# Altium PCB EVB-A32QS1_RFRG_PCB.PcbDoc
Units mm, origin at the board's own origin, x right, y up, seen from the top; angles counter-clockwise.
Board outline 51 x 34 mm, 4 copper layers (L1 (Signal), L2 (GND), L3 (PWR), L4 (Signal)), stack 1.586 mm thick; 35 components, 27 nets, 143 pads, 70 vias.
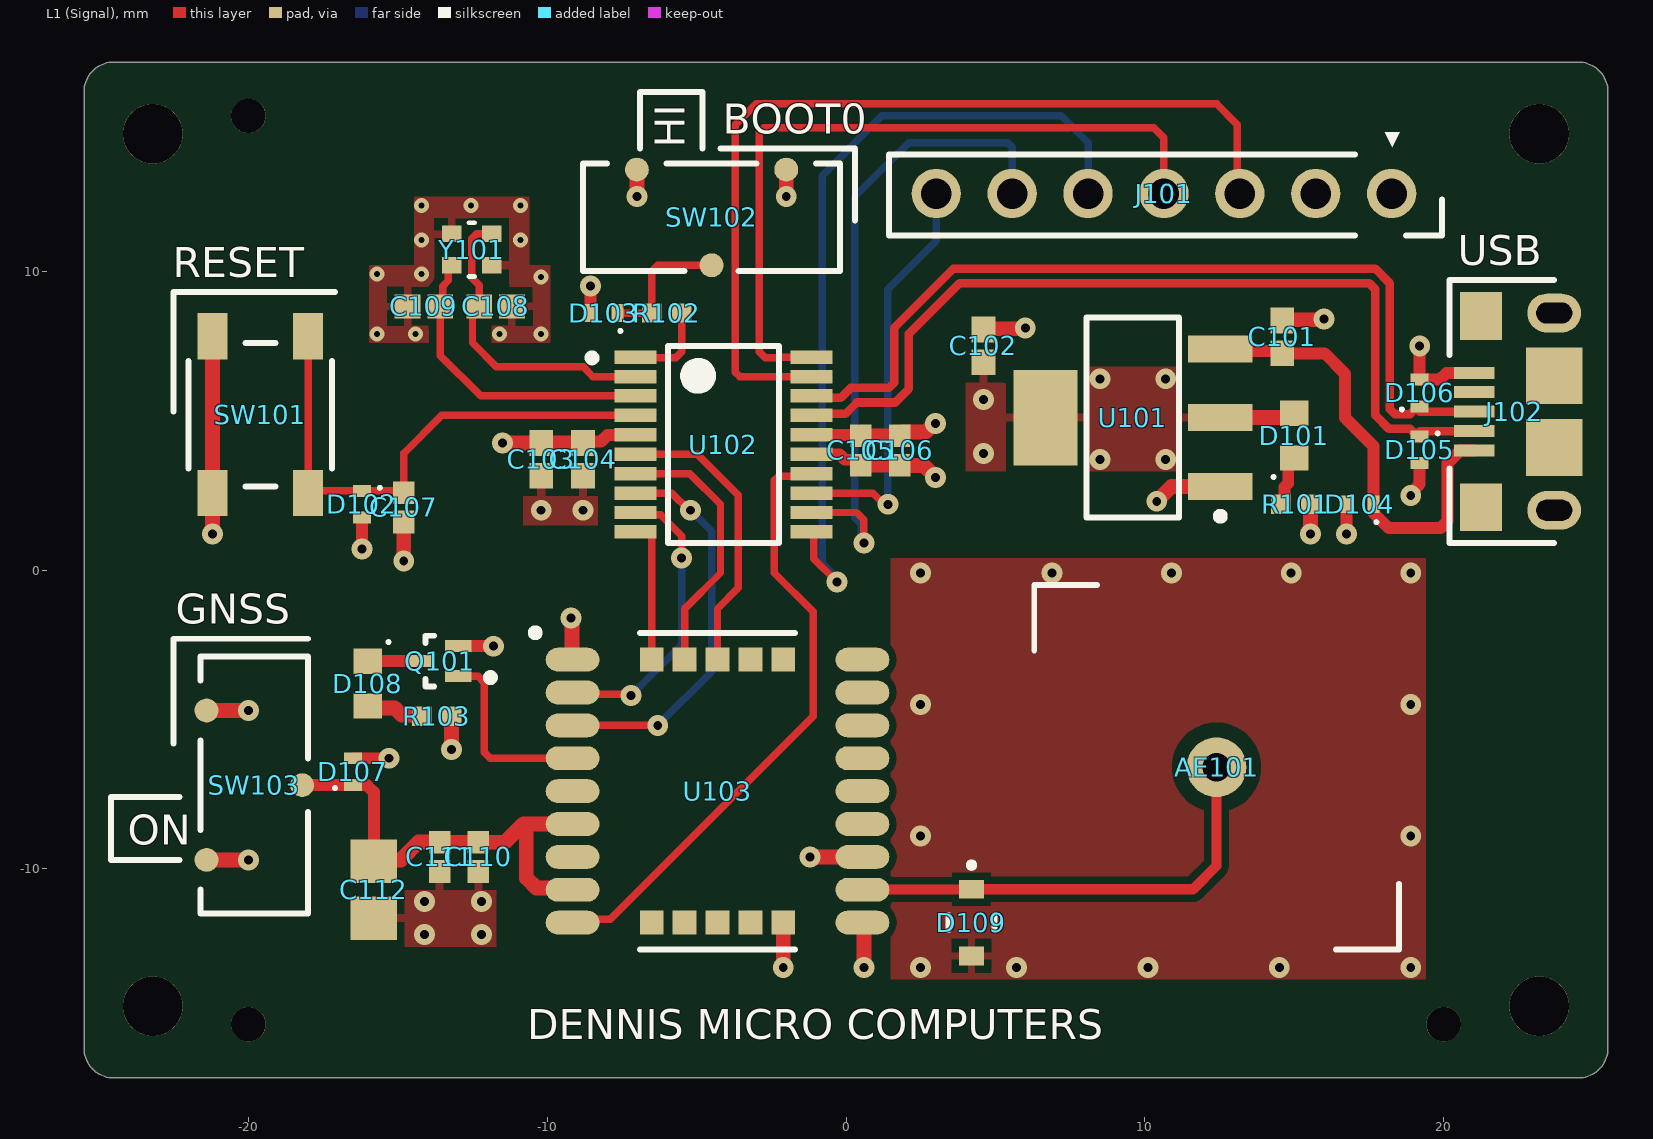
[diagram p0: L1 (Signal) view]
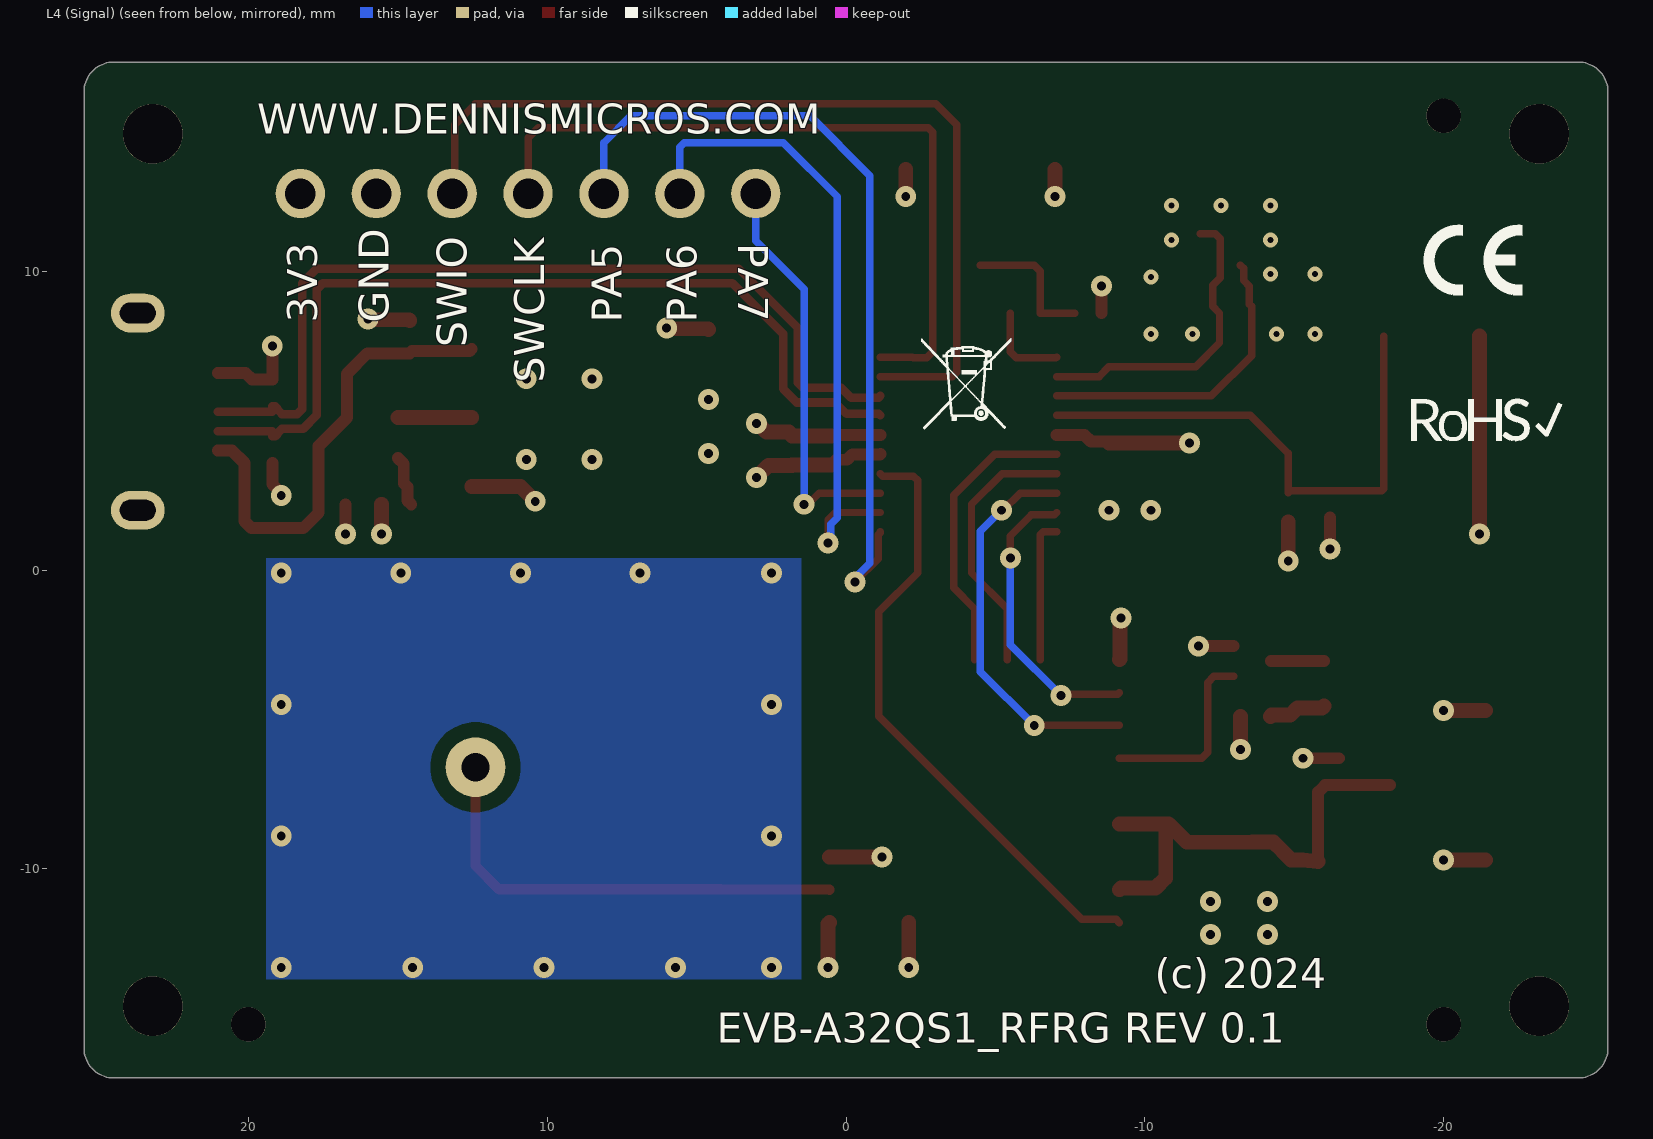
[diagram p1: L4 (Signal) view, seen from below]
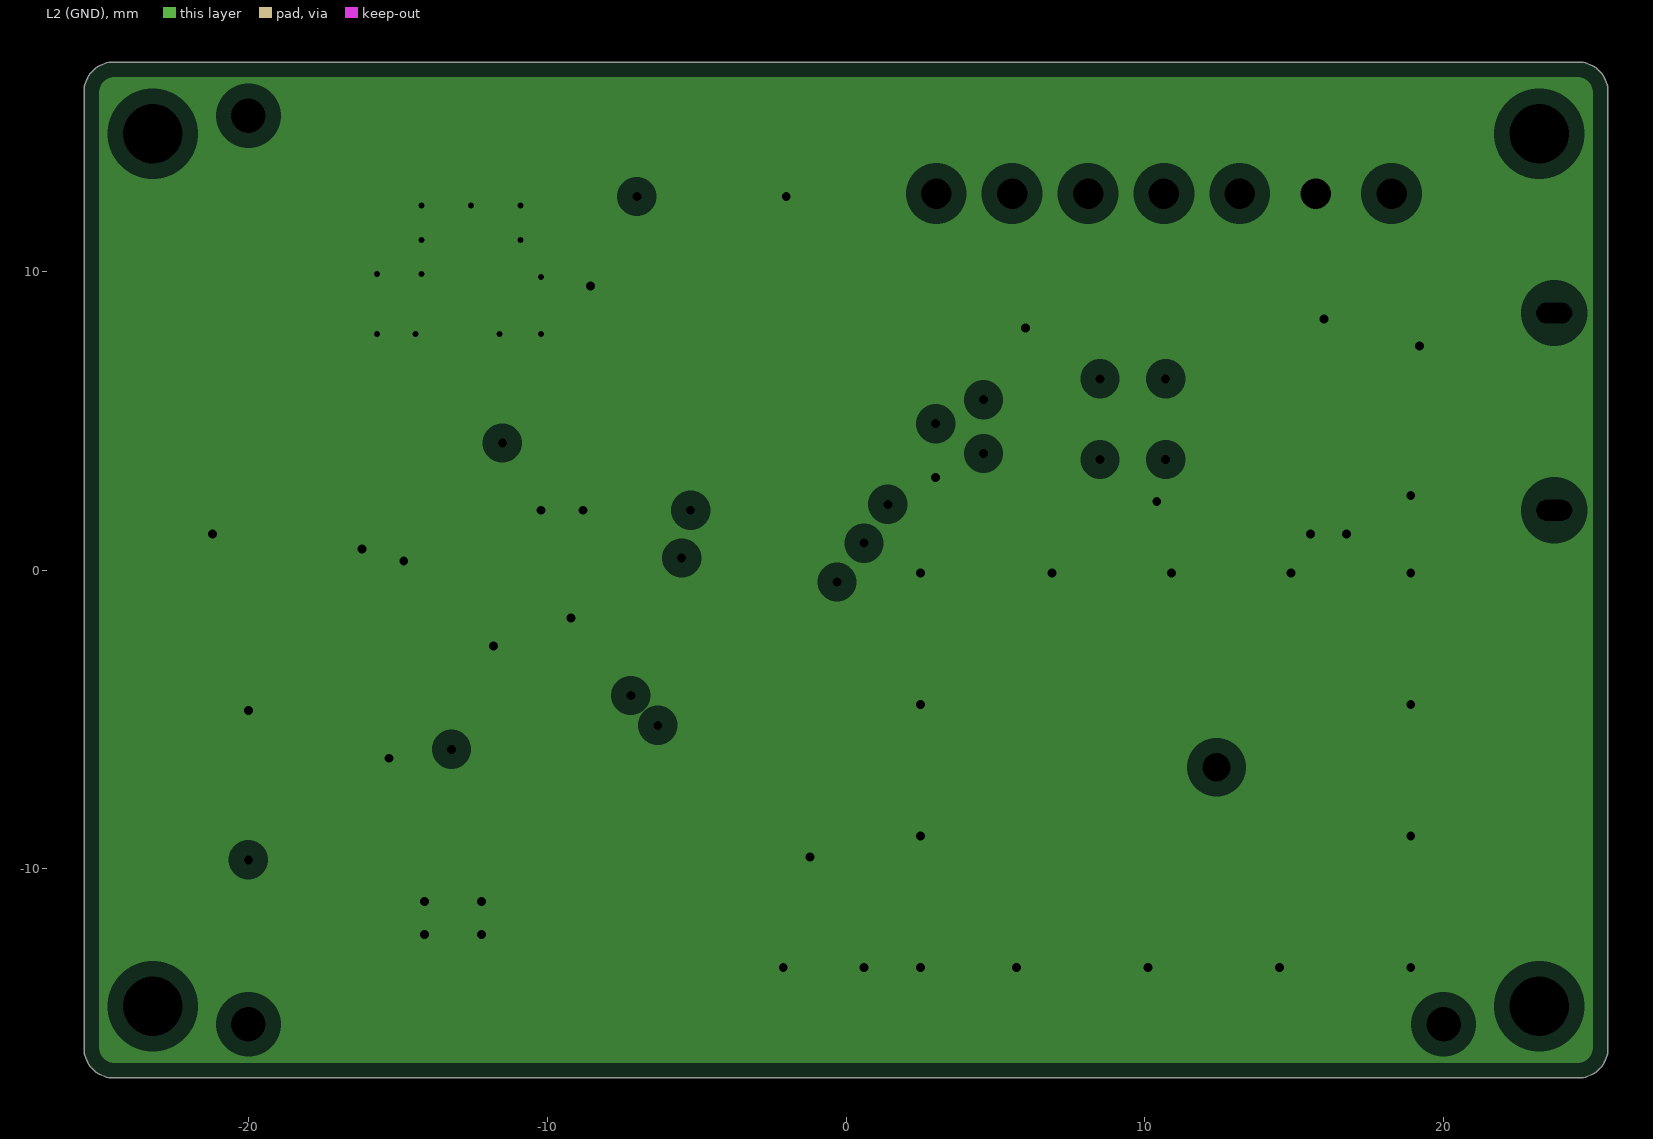
[diagram p2: L2 (GND), clearances drawn from the general rule]
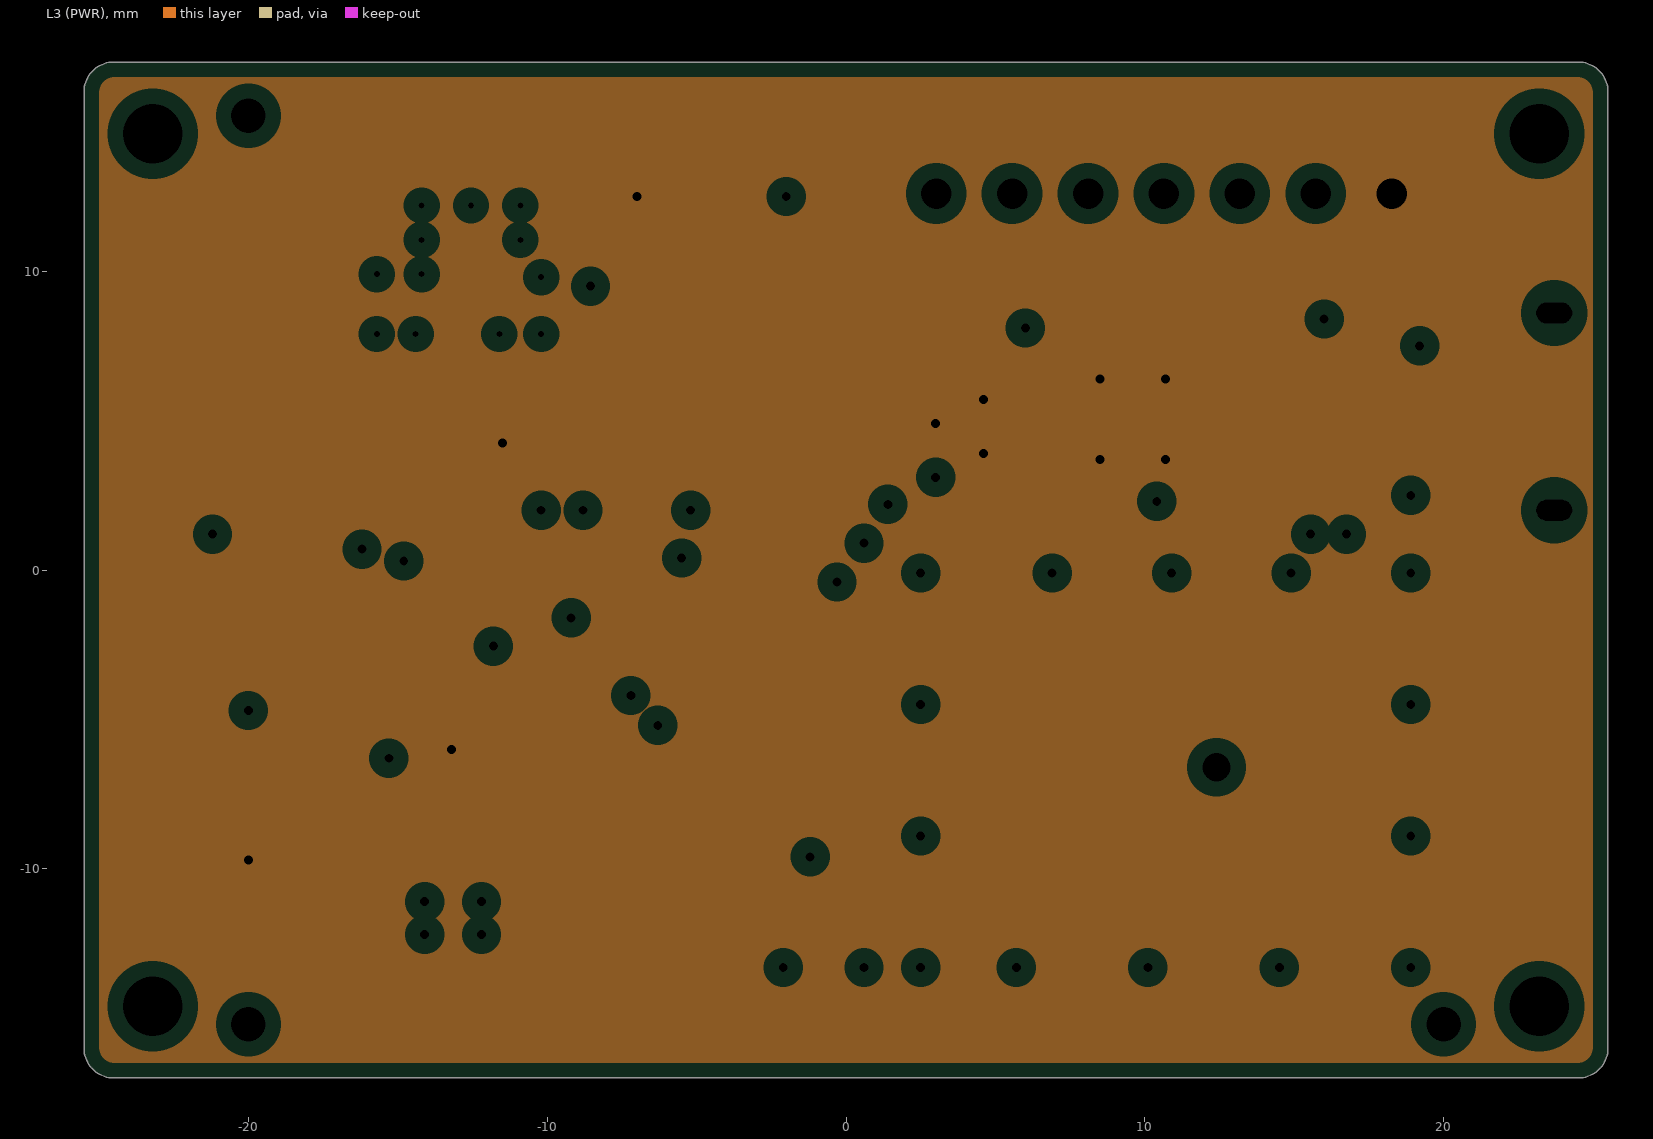
[diagram p3: L3 (PWR), clearances drawn from the general rule]
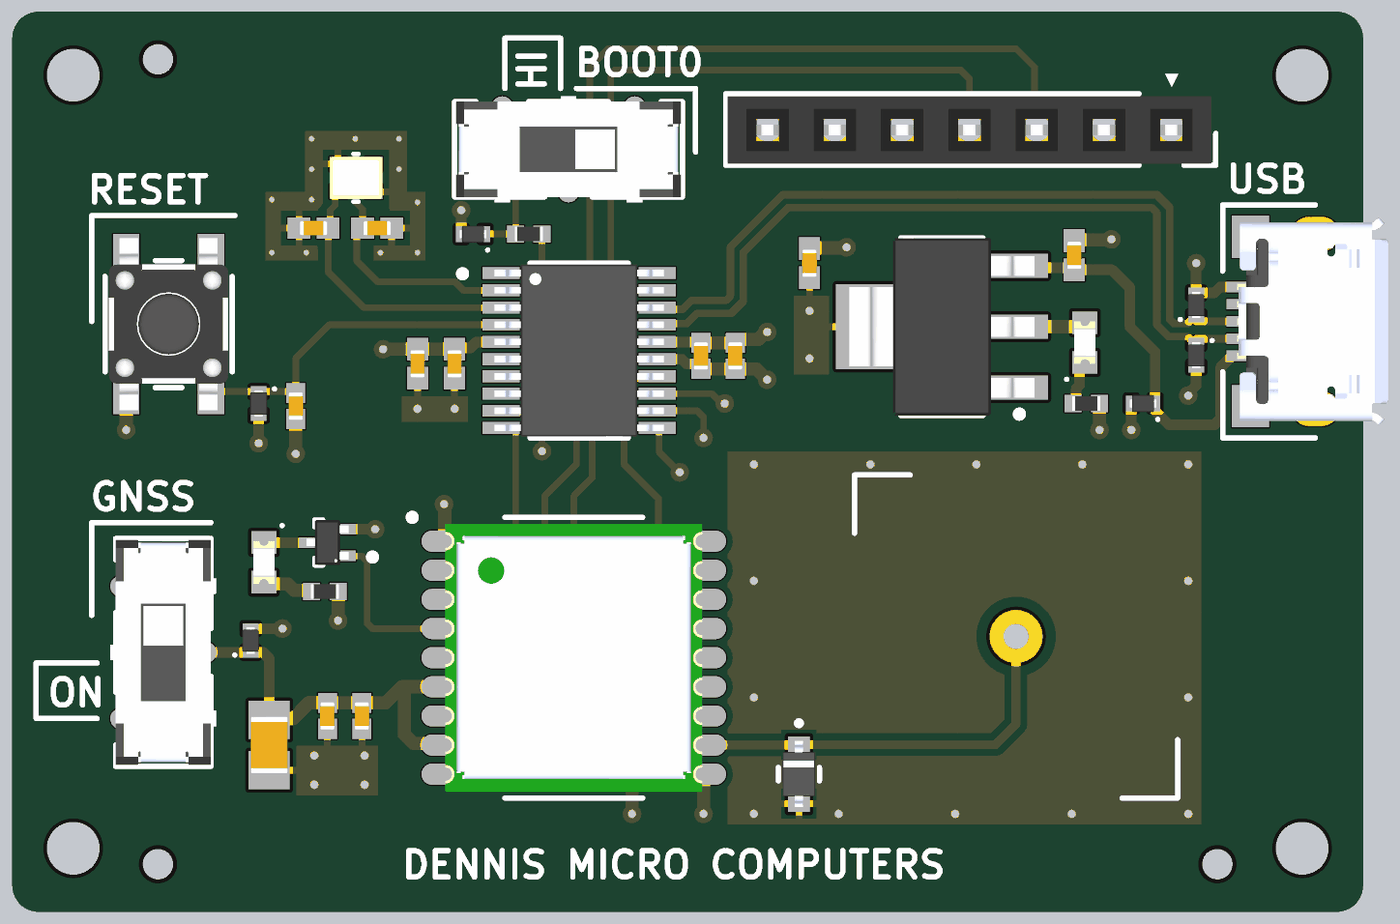
[diagram p4: 3D render of the assembled board from above, using the file's embedded part models]

## Layer stack, top to bottom
Top Solder: solder mask 0.0152, JLC-001, Dk 3.8
L1 (Signal): signal copper 0.035
PP1_7628: prepreg 0.2104, Nan Ya Plastics NP-155F 7628, Dk 4.4
L2 (GND): plane copper 0.0152, net GND
C_FR4: core 1.065, Nan Ya Plastics NP-155F FR4 / 1-7628, Dk 4.6
L3 (PWR): plane copper 0.0152, net +3V3
PP2_7628: prepreg 0.2104, Nan Ya Plastics NP-155F 7628, Dk 4.4
L4 (Signal): signal copper 0.035
Bottom Solder: solder mask 0.0152, JLC-001, Dk 3.8

## Board outline
-25.5,-16 -25.5,16 cw(c-24.5,16) -24.5,17 24.5,17 cw(c24.5,16) 25.5,16 25.5,-16 cw(c24.5,-16) 24.5,-17 -24.5,-17 cw(c-24.5,-16)

## Design rules (kind name [scope] priority, off if disabled: settings)
BoardOutlineClearance [IsText = 'True'] p1: gap=0.3 ignorepadtopadclearanceinfootprint=FALSE
Clearance [All] p1: gap=0.25 ignorepadtopadclearanceinfootprint=FALSE except(0.1: Arc-Arc Arc-Track Track-Track; 0.15: SMDPad-SMDPad; 0.22: Arc-SMDPad Track-SMDPad; 0.27: Arc-Via Arc-Hole Track-Via Track-Hole; 0.5: THPad-THPad)
DiffPairsRouting [InDifferentialPairClass('DIFF_USB')] p1: maxlimit=0.203 minlimit=0.203 mostfreqgap=0.203 toplayer_minwidth=0.286 toplayer_maxwidth=0.286 toplayer_prefwidth=0.286 bottomlayer_minwidth=0.286 bottomlayer_maxwidth=0.286 bottomlayer_prefwidth=0.286 impedanceprofiledriven=TRUE impedanceprofileid={1D80E4EB-765F-47FF-8A09-11E6335E2081} impedanceprofilevalue=90.000000 maxuncoupledlength=12.7
HoleSize NPTHSlotSize [HoleType = 'Slot' && PadIsPlated = 'False'] p1: absolutevalues=TRUE maxlimit=5.6 minlimit=1 maxpercent=80.000 minpercent=20.000
HoleSize PTHSlotSize [HoleType = 'Slot' && PadIsPlated = 'True'] p2: absolutevalues=TRUE maxlimit=5.6 minlimit=0.5 maxpercent=80.000 minpercent=20.000
HoleSize PTHSize [PadIsPlated = 'True'] p3: absolutevalues=TRUE maxlimit=6.35 minlimit=0.2 maxpercent=80.000 minpercent=20.000
HoleSize NPTHSize [PadIsPlated = 'False'] p4: absolutevalues=TRUE maxlimit=6.3 minlimit=0.2 maxpercent=80.000 minpercent=20.000
HoleToHoleClearance [All] p1: gap=0.5 allowstackedmicrovias=TRUE
MinimumAnnularRing ViaMinimumAnnularRing [IsVia] p1: minimumring=0.15
MinimumAnnularRing PTHMinimumAnnularRing [HoleType = 'Round' && IsVia = 'False' && PadIsPlated = 'True'] p2: minimumring=0.3
MinimumAnnularRing PTHSlotMinimumAnnularRing [HoleType = 'Slot' && PadIsPlated = 'True'] p3: minimumring=0.3
MinimumSolderMaskSliver [All] p1: minsoldermaskwidth=0.1
PlaneClearance [All] p1: clearance=0.508
PlaneConnect [All] p1: pad.planeconnectstyle=Relief pad.reliefexpansion=0.508 pad.reliefentries=4 pad.reliefconductorwidth=0.254 pad.reliefairgap=0.254 via.planeconnectstyle=Direct via.reliefexpansion=0.508 via.reliefentries=4 via.reliefconductorwidth=0.254 via.reliefairgap=0.254
PolygonConnect [All] p1: thpad.connectstyle=Relief thpad.reliefconductorwidth=0.254 thpad.reliefentries=4 thpad.polygonreliefangle="90 Angle" thpad.airgapwidth=0.254 smdpad.connectstyle=Relief smdpad.reliefconductorwidth=0.254 smdpad.reliefentries=4 smdpad.polygonreliefangle="90 Angle" smdpad.airgapwidth=0.254 via.connectstyle=Direct via.reliefconductorwidth=0.254 via.reliefentries=4 via.polygonreliefangle="90 Angle" via.airgapwidth=0.254
RoutingVias [All] p1: holewidth=0.3 width=0.7 viastyle="Through Hole" minholewidth=0.2 minwidth=0.5 maxholewidth=0.5 maxwidth=1
SilkToSilkClearance [All] p1: silktosilkclearance=0.3
SilkToSolderMaskClearance [IsPad] p1: minsilkscreentomaskgap=0.15 clearancetoexposedcopper=TRUE
SolderMaskExpansion [All] p1: expansion=0.127 istentingtop=FALSE
SupplyNets "Schematic Supply Nets_6" [InNet('+3V3_GNSS')] p1: voltage=0.000
SupplyNets "Schematic Supply Nets_5" [InNet('VBUS')] p2: voltage=0.000
SupplyNets "Schematic Supply Nets_4" [InNet('GND')] p3: voltage=0.000
SupplyNets "Schematic Supply Nets" [InNet('+3V3')] p4: voltage=0.000
UnRoutedNet [All] p1: checkbadconnections=TRUE
Width AE50 [InNetClass('AE50')] p1: maxlimit=0.342 minlimit=0.342 preferedwidth=0.342 impedanceprofiledriven=TRUE impedanceprofileid={35CBA2D1-E87A-4068-99C0-F5B5DE871103} impedanceprofilevalue=50.000000 minimp=50.000000 maximp=50.000000 favimp=50.000000
Width [All] p2: maxlimit=0.5 minlimit=0.1 preferedwidth=0.25
21 further rules are at their usual default settings.

## Classes and differential pairs
differential pair class DIFF_USB: USB_D
net class AE50: GNSS_RF_IN
differential pair USB_D: +USB_D_P -USB_D_N

## Components (designator, comment, footprint, x,y, rotation, side; value= is the part's Value field where it differs from the comment)
AE101 "YCGA002AA" AE_Quectel_YCGA002AA 12.4,-6.6 r0 top locked
C101 "CC0402MRX5R6BB105" C_Yageo_CC_0402_A 14.6,7.8 r270 top value=1uF
C102 "CC0402MRX5R6BB105" C_Yageo_CC_0402_A 4.6,7.5 r270 top value=1uF
C103 "CC0402MRX5R6BB105" C_Yageo_CC_0402_A -10.2,3.7 r90 top value=1uF
C104 "CC0402KRX7R7BB103" C_Yageo_CC_0402_A -8.8,3.7 r90 top value=10nF
C105 "CL05B104KP5NNNC" C_Samsung_CL_0402_A 0.5,4 r90 top value=100nF
C106 "CL05A475MP5NRNC" C_Samsung_CL_0402_A 1.8,4 r90 top value=4.7uF
C107 "CL05B104KP5NNNC" C_Samsung_CL_0402_A -14.8,2.1 r90 top value=100nF
C108 "CC0402JRNPO9BN150" C_Yageo_CC_0402_A -11.725,8.825 r180 top value=15pF
C109 "CC0402JRNPO9BN150" C_Yageo_CC_0402_A -14.125,8.825 r0 top value=15pF
C110 "CL05C330JB5NNNC" C_Samsung_CL_0402_A -12.3,-9.6 r90 top value=33pF
C111 "CL05B104KP5NNNC" C_Samsung_CL_0402_A -13.6,-9.6 r90 top value=100nF
C112 "CL21A106KOQNNNE" C_Samsung_CL_0805_A -15.8,-10.7 r90 top value=10uF
D101 "LTST-C190GKT" D_LED_Lite-On_Green_0603_A 15,4.5 r90 top
D102 "D5V0F1U2S9-7" D_TVS_Uni_Diodes_SOD-923_B -16.2,2.2 r270 top value=5E-13F
D103 "D5V0F1U2S9-7" D_TVS_Uni_Diodes_SOD-923_B -8.1,8.6 r180 top value=5E-13F
D104 "D5V0F1U2S9-7" D_TVS_Uni_Diodes_SOD-923_B 17.2,2.2 r180 top value=5E-13F
D105 "D5V0F1U2S9-7" D_TVS_Uni_Diodes_SOD-923_B 19.2,4.025 r270 top value=5E-13F
D106 "D5V0F1U2S9-7" D_TVS_Uni_Diodes_SOD-923_B 19.2,5.925 r90 top value=5E-13F
D107 "D5V0F1U2S9-7" D_TVS_Uni_Diodes_SOD-923_B -16.5,-6.75 r90 top value=5E-13F
D108 "LTST-C190GKT" D_LED_Lite-On_Green_0603_A -16,-3.8 r270 top
D109 "ESD7351HT1G" D_TVS_Uni_Onsemi_SOD-323 4.2,-11.8 r270 top
J101 "PPPC071LFBN-RC" J_Sullins_01x07_Socket_2.54mm 10.64,12.6 r180 top
J102 "10118193-0001LF" J_USB_Micro-B_Amphenol_10118193-0001LF 23.7,5.3 r90 top
Q101 "DTC043ZEBTL" Q_Rohm_SOT-416FL_B -13.6,-3.05 r180 top
R101 "RC0402FR-071KL" R_Yageo_RCL_0402_A 15.05,2.2 r180 top value=1kR
R102 "RC0402FR-0710KL" R_Yageo_RCL_0402_A -6,8.6 r0 top value=10kR
R103 "RC0402FR-071KL" R_Yageo_RCL_0402_A -13.7,-4.9 r0 top value=1kR
SW101 "PTS647SN50SMTR2LFS" SW_Tactitle_SPST_C&K_PTS647SN50SMTR2LFS -19.6,5.2 r270 top
SW102 "JS102011JCQN" SW_Slide_C&K_JS102011JCQN -4.5,11.8 r180 top
SW103 "JS102011JCQN" SW_Slide_C&K_JS102011JCQN -19.8,-7.2 r270 top
U101 "TLV1117LV33DCYR" U_TI_SOT-223_B 9.6,5.1 r180 top
U102 "STM32F070F6P6TR" U_ST_TSSOP20_B -4.1,4.2 r0 top
U103 "LC76GABMD" U_QUECTEL_LC76G -4.3,-7.4 r0 top
Y101 "ECS-240-12-37B-CKY-TR" Y_Crystal_GND24_ECS_240-12-37B-CKY-TR -12.525,10.725 r180 top

## Footprints (in the part's own frame and the unit in brackets; to place one, negate y for a bottom-side part, rotate by r counter-clockwise, add the part's x,y. Pads: shape width x height; smd on the part's side, far side on the other; paste and mask are expansions set on the pad)
AE_Quectel_YCGA002AA [mm]
  round 2 hole 0.95: 1(0,0)
  silkscreen extent -6.1,-6.1 6.1,6.1, body extent -6,-6 6,6, height 4
C_Samsung_CL_0402_A [mm] "Chip Capacitor, 2-Leads, Body 1.00x0.50mm, IPC Low Density"
  rect 0.76x0.72 smd mask+0.05: 1(-0.49,0) 2(0.49,0)
  body extent -0.53,-0.28 0.53,0.28, height 0.55
C_Samsung_CL_0805_A [mm] "Chip Capacitor, 2-Leads, Body 2.00x1.25mm, IPC Low Density"
  rect 1.45x1.55 smd: 1(-0.95,0) 2(0.95,0)
  body extent -1.07,-0.7 1.07,0.7, height 1.4
C_Yageo_CC_0402_A [mm] "Yageo series CC Chip Capacitor, 2-Leads, Body 1.00x0.50mm, IPC Low Density"
  rect 0.86x0.8 smd mask+0.05: 1(-0.55,0) 2(0.55,0)
  body extent -0.53,-0.28 0.53,0.28, height 0.7
D_LED_Lite-On_Green_0603_A [mm] "Chip Diode, 2-Leads, Body 1.60x0.70mm, IPC Low Density"
  rect 0.85x0.95 smd: 1(-0.75,0) 2(0.75,0)
  silkscreen extent -1.44,0.64 -1.34,0.74, body extent -0.8,-0.4 0.8,0.4, height 0.8
D_TVS_Uni_Diodes_SOD-923_B [mm] "SODFL, 2-Leads, Body 0.60x1.00mm, IPC Medium Density"
  rect 0.4x0.6 smd: 1(-0.45,0) 2(0.45,0)
  silkscreen extent -0.6,0.55 -0.5,0.65, body extent -0.5,-0.33 0.5,0.33, height 0.4
D_TVS_Uni_Onsemi_SOD-323 [mm]
  rect 0.63x0.83 smd: 1(-1.115,0) 2(1.115,0)
  silkscreen extent -2.02,-0.77 0.25,0.77, body extent -1.25,-0.62 1.25,0.62, height 1
J_Sullins_01x07_Socket_2.54mm [mm]
  round 1.65 hole 1.02 mask+0.05: 1(-7.62,0) 2(-5.08,0) 3(-2.54,0) 4(0,0) 5(2.54,0) 6(5.08,0) 7(7.62,0)
  silkscreen extent -9.3,-1.3 9.2,1.4, body extent -9.14,-1.2 9.14,1.34, height 8.5
J_USB_Micro-B_Amphenol_10118193-0001LF [mm] "USB - micro B USB 2.0 Receptacle Connector 5 Position Surface Mount, Right Angle; Through Hole"
  rect 0.4x1.35 smd mask+0.05: 1(-1.3,2.675) 2(-0.65,2.675) 3(0,2.675) 4(0.65,2.675) 5(1.3,2.675)
  rect 1.6x1.4 smd mask+0.05: 6(-3.2,2.45) 7(3.2,2.45)
  rect 1.9x1.9 smd mask+0.05: 8(1.2,0) 9(-1.2,0)
  oval 1.3x1.8 hole 0.7 slot 1.2 at 90 deg mask+0.05: 10(3.3,0) 11(-3.3,0)
  silkscreen extent -4.4,0 4.4,3.5, body extent -3.93,-2.76 3.93,2.95, height 2.81
Q_Rohm_SOT-416FL_B [mm] "SOTFL, 3-Leads, Body 1.60x1.60mm, Pitch 0.50mm, IPC Medium Density"
  rect 0.9x0.4 smd mask+0.05: 1(-0.625,0.5) 2(-0.625,-0.5) 3(0.625,0)
  silkscreen extent -1.83,-0.85 0.48,0.85, body extent -0.8,-0.85 0.8,0.85, height 0.85
R_Yageo_RCL_0402_A [mm] "Yageo series RC_L Chip Resistor, 2-Leads, Body 1.00x0.50mm, IPC Low Density"
  rect 0.65x0.65 smd mask+0.05: 1(-0.5,0) 2(0.5,0)
  body extent -0.53,-0.28 0.53,0.28, height 0.4
SW_Slide_C&K_JS102011JCQN [mm] "Slide Switch SPDT Surface Mount"
  round 0.8 smd mask+0.05: 1(-2.5,-1.6) 2(0,1.6) 3(2.5,-1.6)
  silkscreen extent -4.3,-1.8 4.3,1.8, body extent -4.25,-2 4.25,2, height 5.4
SW_Tactitle_SPST_C&K_PTS647SN50SMTR2LFS [mm] "Tactitle switch SPST-NO 4.5mm x 4.5mm"
  rect 1.55x1 smd mask+0.05: 1(-2.625,1.6) 2(2.625,1.6) 3(-2.625,-1.6) 4(2.625,-1.6)
  silkscreen extent -2.4,-2.4 2.4,2.4, body extent -3.25,-2.25 3.25,2.25, height 5
U_QUECTEL_LC76G [mm]
  oval 1.8x0.8 smd mask+0.05: 1(-4.85,4.4) 2(-4.85,3.3) 3(-4.85,2.2) 4(-4.85,1.1) 5(-4.85,0) 6(-4.85,-1.1) 7(-4.85,-2.2) 8(-4.85,-3.3) 9(-4.85,-4.4) 10(4.85,-4.4) 11(4.85,-3.3) 12(4.85,-2.2) 13(4.85,-1.1) 14(4.85,0) 15(4.85,1.1) 16(4.85,2.2) 17(4.85,3.3) 18(4.85,4.4)
  rect 0.8x0.8 smd mask+0.05: 19(2.2,4.4) 20(1.1,4.4) 21(0,4.4) 22(-1.1,4.4) 23(-2.2,4.4) 24(-2.2,-4.4) 25(-1.1,-4.4) 26(0,-4.4) 27(1.1,-4.4) 28(2.2,-4.4)
  silkscreen extent -6.22,-5.3 2.6,5.42, body extent -4.85,-5.05 4.85,5.05, height 2.66
U_ST_TSSOP20_B [mm] "TSOP, 20-Leads, Body 6.50x4.40mm, Pitch 0.65mm, IPC Medium Density"
  rect 1.4x0.45 smd mask+0.05: 1(-2.95,2.925) 2(-2.95,2.275) 3(-2.95,1.625) 4(-2.95,0.975) 5(-2.95,0.325) 6(-2.95,-0.325) 7(-2.95,-0.975) 8(-2.95,-1.625) 9(-2.95,-2.275) 10(-2.95,-2.925) 11(2.95,-2.925) 12(2.95,-2.275) 13(2.95,-1.625) 14(2.95,-0.975) 15(2.95,-0.325) 16(2.95,0.325) 17(2.95,0.975) 18(2.95,1.625) 19(2.95,2.275) 20(2.95,2.925)
  silkscreen extent -4.52,-3.3 1.85,3.3, body extent -3.2,-3.25 3.2,3.25, height 1.2
U_TI_SOT-223_B [mm] "SOT223, 4-Leads, Body 6.50x7.00mm (avg), Pitch 2.30mm, IPC Medium Density"
  rect 2.15x0.9 smd: 1(-2.925,2.3) 2(-2.925,0) 3(-2.925,-2.3)
  rect 2.15x3.2 smd: 4(2.925,0)
  silkscreen extent -3.05,-3.35 1.55,3.42, body extent -3.5,-3.35 3.5,3.35, height 1.8
Y_Crystal_GND24_ECS_240-12-37B-CKY-TR [mm]
  rect 0.65x0.55 smd mask+0.05: 1(-0.675,-0.525) 2(0.675,-0.525) 3(0.675,0.525) 4(-0.675,0.525)
  silkscreen extent -0.1,-0.9 0.1,0.9, body extent -1,-0.8 1,0.8, height 0.51

## Part data
AE101: library part CMP-00025-00001-2, "Antenna Module Linear 1602MHz", Frequency (Center/Band)=1.5825GHz, Frequency Group="UHF (1GHz ~ 2GHz)", Frequency Range="1.559GHz ~ 1.606GHz", Manufacturer=Quectel, Antenna Type="Ceramic Patch", Applications="GNSS, GPS", Mounting Type="Surface Mount", Number of Bands=1, RF Family/Standard=Navigation
C101 C102 C103: library part CMP-001-00016-11, "Multilayer Ceramic Capacitor, 1 uF, 50 V, ± 10%, X5R, 0402 [1005 Metric]", Case Code (Imperial)=0402, Case Code (Metric)=1005, Dielectric=X5R, LCSC Part Number=C113791, Max Operating Temperature=85°C, Min Operating Temperature=-55°C, Temperature Coefficient=30ppm/°C, Tolerance=20%, Voltage Rating=10V, Case/Package=0402, ComponentLink1Description=Datasheet, ComponentLink1URL=https://www.yageo.com/upload/media/product/app/datasheet/mlcc/upy-gphc_x5r_4v-to-50v.pdf, Dissipation Factor=10%, Halogen Free="Halogen Free", Height=0.5mm, Lead Free="Lead Free", Length=0.039inch, Material=Ceramic, Mounting Technology="Surface Mount", Packaging="Tape and Reel", Pins=2, RoHS Compliant=Yes, Series=CC, Termination=SMD/SMT, Thickness=0.022inch, Voltage Rating (DC)=10V, Width=0.02inch
C104: library part CMP-001-00029-1, "Multilayer Ceramic Capacitor, 0.01 uF, 16 V, ± 10%, X7R, 0402 [1005 Metric]", Case Code (Imperial)=0402, Case Code (Metric)=1005, Dielectric=X7R, Insulation Resistance=10GR, Max Operating Temperature=125°C, Min Operating Temperature=-55°C, Package Quantity=1, Temperature Coefficient=30ppm/°C, Tolerance=10%, Voltage Rating=16V, Case/Package=0402, ComponentLink1Description=Datasheet, ComponentLink1URL=https://www.yageo.com/upload/media/product/productsearch/datasheet/mlcc/UPY-GPHC_X7R_6.3V-to-250V_24.pdf, Depth=0.5mm, Dissipation Factor=3.5%, Halogen Free="Halogen Free", Height=0.5mm, Lead Free="Lead Free", Length=1mm, Material=Ceramic, Mounting Technology="Surface Mount", Packaging="Tape and Reel", Pins=2, Radiation Hardening=No, Reach SVHC Compliant=No, RoHS Compliant=Yes, Series=CC, Termination=SMD/SMT, Thickness=0.022inch, Voltage Rating (AC)=16V, Voltage Rating (DC)=16V, Width=0.02inch
C105 C107 C111: library part CMP-001-00023-3, "Multilayer Ceramic Capacitor, 0.1 uF, 10 V, ± 10%, X7R, 0402 [1005 Metric]", Case Code (Imperial)=0402, Case Code (Metric)=1005, Dielectric=X7R, Max Operating Temperature=125°C, Min Operating Temperature=-55°C, Package Quantity=1, Tolerance=10%, Voltage Rating=10V, Case/Package=0402, Construction=Flat, Depth=0.5mm, Height=0.5mm, Length=1mm, Material=Ceramic, Mounting Technology="Surface Mount", Packaging="Tape and Reel", Radiation Hardening=No, RoHS Compliant=Yes, Series=CL, Thickness=0.022inch, Voltage Rating (DC)=10V, Width=0.02inch
C106: library part CMP-001-00024-3, "Multilayer Ceramic Capacitor, 4.7 uF, 10 V, ± 20%, X5R, 0402 [1005 Metric]", Case Code (Imperial)=0402, Case Code (Metric)=1005, Dielectric=X5R, Max Operating Temperature=85°C, Min Operating Temperature=-55°C, Tolerance=20%, Voltage Rating=10V, Case/Package=0402, ComponentLink1Description=Datasheet, ComponentLink1URL=https://mm.digikey.com/Volume0/opasdata/d220001/medias/docus/863/CL05A475MP5NRNC_Spec.pdf, Height=550um, Lead Free="Lead Free", Material=Ceramic, Mounting Technology="Surface Mount", Packaging="Cut Tape", RoHS Compliant=Yes, Series=CL
C108 C109: library part CMP-001-00017-14, "Multilayer Ceramic Capacitor, 15 pF, 10 V, ± 5%, X7R, 0402 [1005 Metric]", Case Code (Imperial)=0402, Case Code (Metric)=1005, Dielectric=C0G, Dielectric Material=Ceramic, Insulation Resistance=100GR, Max Operating Temperature=125°C, Min Operating Temperature=-55°C, Package Quantity=1, Temperature Coefficient=30ppm/°C, Tolerance=5%, Voltage=50V, Case/Package=0402, ComponentLink1Description=Datasheet, ComponentLink1URL=https://www.yageo.com/upload/media/product/productsearch/datasheet/mlcc/UPY-GP_NP0_16V-to-50V_18.pdf, Depth=0.5mm, Halogen Free="Halogen Free", Height=0.5mm, Lead Free="Lead Free", Length=1mm, Material=Ceramic, Mounting Technology="Surface Mount", Packaging="Tape and Reel", Pins=2, Radiation Hardening=No, Reach SVHC Compliant=No, RoHS Compliant=Yes, Series=CC, Termination=SMD/SMT, Thickness=0.022inch, Voltage Rating=50V, Voltage Rating (AC)=50V, Voltage Rating (DC)=50V, Width=0.02inch
C110: library part CMP-001-00030-2, "Multilayer Ceramic Capacitor, 33 pF, 50 V, ± 5%, C0G (NP0), 0402 [1005 Metric]", Case Code (Imperial)=0402, Case Code (Metric)=1005, Dielectric=C0G, Max Operating Temperature=125°C, Min Operating Temperature=-55°C, Package Quantity=1, Temperature Coefficient=300ppm/°C, Tolerance=5%, Voltage=50V, Case/Package=0402, ComponentLink1Description=Datasheet, ComponentLink1URL=https://mm.digikey.com/Volume0/opasdata/d220001/medias/docus/2969/CL05C330JB5NNNC_Spec.pdf, Construction=Flat, Depth=0.5mm, Height=0.5mm, Lead Free="Lead Free", Length=1mm, Material=Ceramic, Mounting Technology="Surface Mount", Packaging="Tape and Reel", Radiation Hardening=No, RoHS Compliant=Yes, Series=CL, Thickness=0.022inch, Voltage Rating=50V, Voltage Rating (DC)=50V, Width=0.02inch
C112: library part CMP-001-00022-4, "Multilayer Ceramic Capacitor, 10 uF, 16 V, ± 10%, X5R, 0805 [2012 Metric]", Case Code (Imperial)=0805, Case Code (Metric)=2012, Dielectric=X7R, Max Operating Temperature=85°C, Min Operating Temperature=-55°C, Package Quantity=1, Tolerance=10%, Voltage=16V, Case/Package=0805, ComponentLink1Description=Datasheet, ComponentLink1URL=https://mm.digikey.com/Volume0/opasdata/d220001/medias/docus/609/CL21A106KOQNNNE_Spec.pdf, Construction=Flat, Depth=1.25mm, Height=1.25mm, Lead Free="Lead Free", Length=2mm, Material=Ceramic, Mounting Technology="Surface Mount", Packaging="Tape and Reel", Radiation Hardening=No, RoHS Compliant=Yes, Series=CL, Thickness=0.055inch, Voltage Rating=16V, Voltage Rating (DC)=16V, Width=0.049inch
D101 D108: library part CMP-007-00001-3, "LED Uni-Color Green 565nm 2-Pin Chip LED T/R", Case Code (Imperial)=0603, Case Code (Metric)=1608, Color=Green, Forward Current=30mA, Forward Voltage=2.1V, Lens Color=Colorless, Max Operating Temperature=85°C, Min Operating Temperature=-55°C, Package Quantity=1, Power Dissipation=100mW, Reverse Voltage=5V, Test Current=10mA, Voltage=2V, Case/Package=0603, ComponentLink1Description=Datasheet, ComponentLink1URL=https://mm.digikey.com/Volume0/opasdata/d220001/medias/docus/858/LTST-C190GKT.pdf, Depth=0.8mm, Dominant Wavelength=569nm, Height=0.9mm, Illumination Color=Green, Lead Free="Lead Free", Length=1.6mm, Lens Size=0.8mm, Lens Style=Flat,Diffused,Colorless,Rectangular,Clear, Lens Transparency=Clear, Luminous Intensity=6mcd, Mounting Technology="Surface Mount", Number of Elements=1, Number of LEDs=1, Packaging="Tape and Reel", Pins=2, Power Rating=100mW, Radiation Hardening=No, RoHS Compliant=Yes, Series=-, Viewing Angle=130°, Wavelength=565nm, Width=0.8mm
D102 D103 D104 D105 D106 D107: library part CMP-004-00007-2, "Diode TVS Dual Uni-Dir 5.5V 250000W 2-Pin SOD-923 T/R", Breakdown Voltage=6V, Case/Package=SOD-923-2, Clamping Voltage=10V, Max Operating Temperature=150°C, Max Power Dissipation=250mW, Max Reverse Leakage Current=100nA, Max Surge Current=1.5A, Min Operating Temperature=-65°C, Package Quantity=10000, Peak Pulse Power=250kW, Power Line Protection=Yes, Reverse Standoff Voltage=5.5V, ComponentLink1Description=Datasheet, ComponentLink1URL=https://www.diodes.com/assets/Datasheets/D5V0F1U2S9.pdf, Contact Plating=Tin,Matte, Diode Type=ZENER, Direction=Unidirectional, ESD Protection=Yes, Min Breakdown Voltage=6V, Mounting Technology="Surface Mount", Number of Unidirectional Channels=1, Packaging="Tape and Reel", Peak Pulse Current=1.5A, Polarity=Unidirectional, RoHS Compliant=Yes, Series=-, Termination=SMD/SMT, Working Voltage=5.5V
D109: library part CMP-004-00006-1, "TVSDIODE3.3VWMSOD-323", Case/Package=SOD, Max Operating Temperature=150°C, Min Breakdown Voltage=5V, Min Operating Temperature=-55°C, Package Quantity=3000, Power Line Protection=No, Reverse Standoff Voltage=3.3V, ComponentLink1Description=Datasheet, ComponentLink1URL=https://www.onsemi.com/pdf/datasheet/esd7351-d.pdf, Diode Type=ZENER, Lead Free="Lead Free", Mounting Technology="Surface Mount", Number of Unidirectional Channels=1, Packaging="Tape and Reel", RoHS Compliant=Yes, Series="Automotive, AEC-Q101"
J101: library part CMP-002-00007-1, "Conn Hdr 7POS 0.1 Gold Pcb", Flammability Rating="UL94 V-0", Insulation Color=Black, Max Operating Temperature=105°C, Min Operating Temperature=-40°C, Voltage Rating=250V, ComponentLink1Description=Datasheet, ComponentLink1URL=https://mm.digikey.com/Volume0/opasdata/d220001/medias/docus/937/Female_Headers.100_DS.pdf, Connector Type=Header, Contact Finish - Mating=GOLD, Contact Material=Bronze, Contact Shape=Square, Contact Type="Female Socket", Fastening Type=Pull, Height=8.5mm, Housing Material=Plastic, Insulation Material=Polyester, Lead Free="Lead Free", Length=18.3mm, Mounting Technology="Through Hole", Number of Positions=7, Number of Rows=1, Packaging=Tray, RoHS Compliant=Yes, Series=-, Termination=Solder, Width=2.5mm
J102: library part CMP-002-00002-12, "Usb Connector, 5 Contact(S), Female, Right Angle, Surface Mount Terminal, Locking, Receptacle", Color=Black, Current Rating=1.8A, Flammability Rating="UL94 V-0", Insulation Resistance=1GR, Max Operating Temperature=85°C, Max Voltage Rating (AC)=100V, Min Operating Temperature=-55°C, Package Quantity=1200, ComponentLink1Description=Drawing, ComponentLink1URL=https://cdn.amphenol-cs.com/media/wysiwyg/files/drawing/10118193.pdf, ComponentLink2Description=Datasheet, ComponentLink2URL=https://cdn.amphenol-cs.com/media/wysiwyg/files/documentation/datasheet/inputoutput/io_usb_micro.pdf, Connector Type=USB,Receptacle, Contact Material=Nickel,Gold, Contact Plating=Gold, Depth=5.67mm, Features=Shielded, Gender=Female, Height=3mm, Housing Material=Polymer, Length=7.86mm, Mounting Technology="Surface Mount,Horizontal", Number of Contacts=5, Number of Ports=1, Orientation="Right Angle", Packaging="Tape and Reel", Pins=11, Pitch=650um, Radiation Hardening=No, Series=-, Termination=Solder, USB Standard="USB 2.0", Voltage Rating=100V
Q101: library part CMP-013-00001-2, "TRANS PREBIAS NPN 50V EMT3F", Clock Frequency=250MHz, Collector Emitter Breakdown Voltage=50V, Collector-emitter Voltage-Max=150mV, Continuous Collector Current=100mA, Max Operating Temperature=150°C, Max Power Dissipation=150mW, Min Operating Temperature=-55°C, Output Voltage=50mV, Package Quantity=3000, ComponentLink1Description=Datasheet, ComponentLink1URL=https://fscdn.rohm.com/en/products/databook/datasheet/discrete/transistor/digital/dtc043zebtl-e.pdf, Lead Free="Lead Free", Max Breakdown Voltage=50V, Max Collector Current=100mA, Mounting Technology="Surface Mount", Packaging="Tape and Reel", Pins=3, Polarity=NPN, Radiation Hardening=No, RoHS Compliant=Yes, Series=-, Transition Frequency=250MHz
R101 R103: library part CMP-009-00002-11, "SMD Chip Resistor, 1 kOhm, ± 1%, 62.5 mW, 0402 [1005 Metric], Thick Film, General Purpose", Case Code (Imperial)=0402, Case Code (Metric)=1005, Max Operating Temperature=155°C, Max Power Dissipation=63mW, Min Operating Temperature=-55°C, Power Rating=62.5mW, Resistance Tolerance=1%, Resistor Type="Thick Film", Temperature Coefficient=100ppm/°C, Voltage Rating=50V, Case/Package=0402, ComponentLink1Description=Datasheet, ComponentLink1URL=https://www.yageo.com/upload/media/product/products/datasheet/rchip/PYu-RC_Group_51_RoHS_L_12.pdf, Construction=Rectangular, Depth=0.5mm, Features="Moisture Resistant", Height=0.32mm, Lead Free="Lead Free", Length=1mm, Military Standard=Not, Number of Terminations=2, Packaging="Tape and Reel", Pins=2, Reach SVHC Compliant=No, RoHS Compliant=Yes, Series=RC, Technology="THICK FILM", Termination=SMD/SMT, Tolerance=1%, Voltage Rating (AC)=50V, Voltage Rating (DC)=50V, Width=0.5mm
R102: library part CMP-009-00003-11, "SMD Chip Resistor, 10 kOhm, ± 1%, 62.5 mW, 0402 [1005 Metric], Thick Film, General Purpose", Case Code (Imperial)=0402, Case Code (Metric)=1005, Max Operating Temperature=155°C, Max Power Dissipation=63mW, Min Operating Temperature=-55°C, Power Rating=62.5mW, Resistance Tolerance=1%, Resistor Type="Thick Film", Temperature Coefficient=100ppm/°C, Voltage Rating=50V, Case/Package=0402, ComponentLink1Description=Datasheet, ComponentLink1URL=https://www.yageo.com/upload/media/product/products/datasheet/rchip/PYu-RC_Group_51_RoHS_L_12.pdf, Construction=Rectangular, Depth=0.5mm, Features="Moisture Resistant", Lead Free="Lead Free", Lead Pitch=0.2mm, Length=1mm, Military Standard=Not, Number of Terminations=2, Packaging="Tape and Reel", Pins=2, Reach SVHC Compliant=Unknown, RoHS Compliant=Yes, Series=RC, Termination=SMD/SMT, Tolerance=1%, Voltage Rating (DC)=50V, Width=0.5mm
SW101: library part CMP-011-00000-13, "Switch Tactile N.O. SPST Round Button Gull Wing 0.05A 12VDC 100000Cycles 0.98N SMD T/R", Max Operating Temperature=70°C, Min Operating Temperature=-20°C, Operating Force=100gf, Ratings=IP40, Actuator Type=Standard, ComponentLink1Description=Datasheet, ComponentLink1URL=https://www.ckswitches.com/media/2567/pts647.pdf, Illumination Type=Non-Illuminated, Mechanical Life=100000Cycles, Mounting Technology="Surface Mount", Number of Positions=2, Packaging="Cut Tape", Series=PTS647, Switch Function=Off-Mom, Switch Travel=0.25mm, Termination="Gull Wing", Throw Configuration=SPST
SW102 SW103: library part CMP-011-00001-10, "JS Series Sub-Miniature Slide Switch SPDT On-On Top Slide 0.3A 6VDC J-Lead Surface Mount T/R", Max Operating Temperature=85°C, Min Operating Temperature=-40°C, Voltage Rating (DC)=6V, Actuator Length=2mm, Actuator Material=Nylon,Polyamide,PA46, Actuator Type=Standard, ComponentLink1Description=Datasheet, ComponentLink1URL=https://www.ckswitches.com/media/1422/js.pdf, Contact Material="Copper Alloy", Contact Plating=Silver, Electrical Life=5000Cycles, Mounting Technology="Surface Mount", Packaging="Cut Tape", Series=JS, Switch Function=On-On, Switch Travel=2mm, Throw Configuration=SPDT
U101: library part CMP-019-00002-2, "LDO Regulator Pos 3.3V 1A 4-Pin(3+Tab) SOT-223 T/R", Case/Package=SOT-223-4, Dropout Voltage=570mV, Max Operating Temperature=125°C, Max Output current=1A, Max Output Voltage=3.3V, Max Supply Voltage=5.5V, Min Input Voltage=2V, Min Operating Temperature=-40°C, Operating Supply Current=50uA, Package Quantity=2500, Power Supply Rejection Ratio (PSRR)=75dB, Accuracy=2%, ComponentLink1Description=Datasheet, ComponentLink1URL=https://www.ti.com/lit/ds/symlink/tlv1117lv.pdf?HQS=dis-dk-null-digikeymode-dsf-pf-null-wwe&ts=1720283554424&ref_url=https%253A%252F%252Fwww.ti.com%252Fgeneral%252Fdocs%252Fsuppproductinfo.tsp%253FdistId%253D10%2526gotoUrl%253Dhttps%253A%252F%252Fwww.ti.com%252Flit%252Fgpn%252Ftlv1117lv, Lead Free="Lead Free", Min Output Voltage=3.3V, Number of Regulators=1, Output Configuration=Positive, Output Current=1A, Output Type=Fixed, Packaging="Cut Tape", Pins=4, Polarity=Positive, Quiescent Current=50uA, RoHS Compliant=Yes, Series=-, Weight=0.009171oz
U102: library part CMP-020-00001-5, "IC MCU 32BIT 32KB FLASH 20TSSOP", Case/Package=TSSOP, Max Operating Temperature=85°C, Min Operating Temperature=-40°C, ComponentLink1Description=Datasheet, ComponentLink1URL=https://www.st.com/content/ccc/resource/technical/document/datasheet/31/4f/10/5f/a5/32/46/42/DM00141386.pdf/files/DM00141386.pdf/jcr:content/translations/en.DM00141386.pdf, Core Architecture=ARM, Interface=I2C,SPI,USB,UART,USART, Memory Format=FLASH, Memory Size=32KB, Mounting Technology="Surface Mount", Number of I/Os=15, Oscillator Type=Internal, Packaging="Cut Tape", Peripherals=POR,PWM,WDT,DMA, Pins=20, Series=STM32F0
U103: library part CMP-00025-00000-4, "Navigation BeiDou, Galileo, GLONASS, GPS, GNSS Transceiver Module 1.561GHz, 1.575GHz, 1.602GHz Antenna Not Included Surface Mount", Frequency="1.561GHz, 1.575GHz, 1.602GHz", Package="28-SMD Module", Supply Voltage="2.55V ~ 3.6V", Mounting Type="Surface Mount", Protocol="BeiDou, Galileo, GLONASS, GPS, GNSS", Sensivity=-166dBm, Serial Interfaces="I2C, UART"
Y101: library part CMP-003-00000-11, "Crystal 24MHz ±10ppm (Tol) ±10ppm (Stability) 12pF FUND 50Ohm 4-Pin Mini-CSMD T/R", Case/Package="4-SMD, No Lead", Frequency=24MHz, Load Capacitance=12pF, ComponentLink1Description=Datasheet, ComponentLink1URL=https://ecsxtal.com/store/pdf/ECX-1637B.pdf, Size="0.079\" L x 0.063\" W (2.00mm x 1.60mm)"

## Free pads (board coordinates)
  round 2 hole 2 unplated: MH1(-23.2,14.6) MH2(23.2,14.6) MH3(-23.2,-14.6) MH4(23.2,-14.6)
  round 1.152 hole 1.152 unplated mask+0.148: TH1(-20,15.2) TH2(-20,-15.2) TH3(20,-15.2)

## Via types
v1: diameter 0.7, hole 0.3, L1 (Signal) to L4 (Signal), tented both sides, 58 vias
v2: diameter 0.5, hole 0.2, L1 (Signal) to L4 (Signal), tented both sides, 12 vias

## Nets (pads, with @x,y where several pads share a name; then routed paths per layer and width w, separated by ;. In a path a pad name is that pad's centre, name@x,y a point inside that pad or via, vN(x,y) a via of type N, cw(c..) or ccw(c..) an arc to the next point about the centre after c; other vN are vias at no path point)
3V3_LED_K: D101.1 R101.2 | length 1.7
  L1 (Signal) w0.4: R101.2 14.674,2.324 14.674,2.774 14.8,2.9 14.8,3.55 D101.1
+3V3: C102.2 C103.2 C104.2 C105.2 C106.2 D101.2 J101.1 R103.2 SW102.3 SW103.3 U101.2 U101.4 U102.5 U102.16 | length 14.8
  L1 (Signal) w0.4: C104.2 -8.75,4.3 -8.2,4.3 -7.98,4.52 -7.055,4.52 U102.5 ; U102.16 -1.145,4.52 0.47,4.52 C105.2
  L1 (Signal) w0.5: SW103.3 v1(-20,-9.7) ; v1(-13.2,-6) R103.2 ; v1@-11.5,4.3 ccw(c-11.45,4.3) -11.45,4.25 C103.2 C104.2 ; v1(-7,12.5) SW102.3 ; C105.2 C106.2 1.91,4.6 1.91,4.62 2.666,4.62 2.946,4.9 v1(3,4.9) ; U101.2 D101.2@15,5.1
  other v1: 8.5,3.7 10.7,3.7 4.6,3.9 -11.5,4.25 4.6,5.7 8.5,6.4 10.7,6.4
+3V3_GNSS: C110.2 C111.2 C112.2 D107.1 SW103.2 U103.6 U103.8 | length 15.5
  L1 (Signal) w0.4: SW103.2 -16.6,-7.2 -16.034,-7.2 -15.8,-7.434 C112.2
  L1 (Signal) w0.5: C112.2 -15.275,-9.7 -14.893,-9.7 -14.6,-9.407 -14.6,-9.4 -14.3,-9.1 -13.61,-9.1 C111.2 C110.2 -11.41,-9.11 -10.8,-8.5 ; U103.8 -9.207,-10.643 -10.357,-10.643 -10.7,-10.3 -10.7,-8.6 -10.8,-8.5 ; U103.6 -10.8,-8.5
BOOT0: R102.2 U102.1 | length 2.9
  L1 (Signal) w0.25: U102.1 -7.025,7.1 -5.7,7.1 -5.5,7.3 R102.2
GND: C101.1 C102.1 C103.1 C104.1 C105.1 C106.1 C107.1 C108.1 C109.1 C110.1 C111.1 C112.1 D102.2 D103.2 D104.2 D105.2 D106.2 D107.2 D109.2 J101.2 J102.5 Q101.2 R101.1 SW101.3 SW101.4 SW102.1 SW103.1 U101.1 U102.15 U103.1 U103.10 U103.12 U103.28 Y101.2 Y101.4 | length 36.5
  L1 (Signal) w0.4: D107.2 v1(-15.3,-6.3) ; v1(-16.2,0.7) D102.2 ; Q101.2 -11.85,-2.55 v1@-11.8,-2.5 ; D103.2 -8.55,9.45 v1@-8.5,9.5 ; U102.15 -1.145,3.87 -0.214,3.87 -0.034,3.69 C105.1@0.34,3.69 ; D104.2 16.75,1.25 v1@16.8,1.2 ; v1(18.9,2.5) 18.9,2.573 19.2,2.873 D105.2 ; v1(19.2,7.5) D106.2 19.875,6.375 20.1,6.6 J102.5
  L1 (Signal) w0.5: SW103.1 v1(-20,-4.7) ; v1(-21.2,1.2) SW101.4 SW101.3 ; v1(-14.8,0.3) C107.1 ; v1(-9.2,-1.6) -9.175,-1.625 -9.175,-2.975 U103.1 ; v1(-2.1,-13.3) U103.28 ; v1(-2,12.5) SW102.1 ; v1(-1.2,-9.6) U103.12 ; C105.1 C106.1 1.805,3.505 2.595,3.505 v1(3,3.1) ; U103.10 0.6,-11.85 v1(0.6,-13.3) ; C102.1 4.625,8.075 5.975,8.075 v1(6,8.1) ; v1(10.4,2.3) 10.9,2.8 U101.1 ; C101.1 14.625,8.375 15.975,8.375 v1(16,8.4) ; v1(15.55,1.2) R101.1
  other v1: 2.5,-13.3 5.7,-13.3 10.1,-13.3 14.5,-13.3 18.9,-13.3 -14.1,-12.2 -12.2,-12.2 -14.1,-11.1 -12.2,-11.1 2.5,-8.9 18.9,-8.9 2.5,-4.5 18.9,-4.5 -11.8,-2.55 2.5,-0.1 6.9,-0.1 10.9,-0.1 14.9,-0.1 18.9,-0.1 16.75,1.2 -10.2,2 -8.8,2 -8.55,9.5
  other v2: -15.7,7.9 -14.4,7.9 -11.6,7.9 -10.2,7.9 -10.2,9.8 -15.7,9.9 -14.2,9.9 -14.2,11.05 -10.9,11.05 -14.2,12.2 -12.55,12.2 -10.9,12.2
GNSS_1PPS: Q101.1 U103.4 | length 6.3
  L1 (Signal) w0.25: Q101.1 -12.964,-3.561 -12.306,-3.561 -12.1,-3.767 -12.1,-6.1 -11.9,-6.3 U103.4
GNSS_3D: U102.10 U103.23 | length 4.8
  L1 (Signal) w0.25: U102.10 -6.6,1.275 -6.5,1.175 U103.23
GNSS_GEO: U102.6 U103.21 | length 9.8
  L1 (Signal) w0.25: U102.6 -4.975,3.875 -3.6,2.5 -3.6,-0.6 -4.3,-1.3 U103.21
GNSS_JAM: U102.7 U103.22 | length 9
  L1 (Signal) w0.25: U102.7 -5.225,3.225 -4.2,2.2 -4.2,-0.1 -5.4,-1.3 U103.22
GNSS_LED_A: D108.2 R103.1 | length 1.9
  L1 (Signal) w0.5: D108.2 -15.934,-4.616 -15.106,-4.616 -14.866,-4.856 -14.244,-4.856 R103.1
GNSS_LED_K: D108.1 Q101.3 | length 1.8
  L1 (Signal) w0.4: D108.1 -14.475,-3.05 Q101.3
GNSS_NRST: U102.14 U103.9 | length 20.7
  L1 (Signal) w0.25: U103.9 -9.045,-11.695 -7.895,-11.695 -1.1,-4.9 -1.1,-1.4 -2.4,-0.1 -2.4,2.999 -2.254,3.145 -1.23,3.145 U102.14
GNSS_RF_IN: AE101.1 D109.1 U103.11 | length 15.5
  L1 (Signal) w0.342: U103.11 0.558,-10.693 4.193,-10.693 D109.1 11.615,-10.685 12.4,-9.9 AE101.1
GNSS_RXD: U102.8 U103.3 | length 13.2
  L1 (Signal) w0.25: U103.3 v1(-6.3,-5.2) ; U102.8 -5.827,2.575 -5.252,2 v1(-5.2,2)
  L4 (Signal) w0.25: v1(-6.3,-5.2) -4.5,-3.4 -4.5,1.3 v1(-5.2,2)
GNSS_TXD: U102.9 U103.2 | length 9.9
  L1 (Signal) w0.25: U103.2 -9.1,-4.15 -7.25,-4.15 v1(-7.2,-4.2) ; U102.9 -6.97,1.845 -6.207,1.845 -5.5,1.138 v1(-5.5,0.4)
  L4 (Signal) w0.25: v1(-7.2,-4.2) -5.5,-2.5 v1(-5.5,0.4)
NRST: C107.2 D102.1 SW101.1 SW101.2 U102.4 | length 17.9
  L1 (Signal) w0.25: SW101.1 -18,2.725 -17.925,2.65 D102.1 -14.86,2.65 C107.2 -14.8,3.9 -13.525,5.175 U102.4
OSC_IN: C108.2 U102.2 Y101.1 | length 10.3
  L1 (Signal) w0.25: Y101.1 -12.354,11.25 -12.52,11.084 -12.52,9.782 -12.275,9.537 C108.2 -12.5,8.6 -12.5,7.6 -11.7,6.8 -8.8,6.8 -8.475,6.475 U102.2
OSC_OUT: C109.2 U102.3 Y101.3 | length 10.3
  L1 (Signal) w0.25: Y101.3 -13.304,10.096 -13.304,9.696 -13.5,9.5 -13.5,8.9 C109.2 -13.575,7.175 -12.225,5.825 U102.3
PA5: J101.5 U102.11 | length 27.6
  L1 (Signal) w0.25: U102.11 -1.15,1.25 -1.075,1.175 -1.075,0.375 v1(-0.3,-0.4)
  L4 (Signal) w0.25: v1(-0.3,-0.4) -0.3,-0.278 -0.8,0.222 -0.8,13.2 1.2,15.2 7.2,15.2 8.1,14.3 J101.5
PA6: J101.6 U102.12 | length 22
  L1 (Signal) w0.25: U102.12 0.354,1.925 0.6,1.679 v1(0.6,0.9)
  L4 (Signal) w0.25: v1(0.6,0.9) 0.514,0.986 0.514,1.536 0.3,1.75 0.3,12.5 2.1,14.3 5.414,14.3 5.56,14.154 J101.6
PA7: J101.7 U102.13 | length 13.8
  L1 (Signal) w0.25: U102.13 0.903,2.575 1.278,2.2 v1(1.4,2.2)
  L4 (Signal) w0.25: v1(1.4,2.2) 1.4,9.4 3.02,11.02 J101.7
SW_BOOT0: D103.1 R102.1 SW102.2 | length 4.6
  L1 (Signal) w0.25: D103.1 R102.1 -6.5,10 -6.3,10.2 SW102.2
SW_CLK: J101.4 U102.20 | length 24.8
  L1 (Signal) w0.25: U102.20 -2.225,7.125 -2.246,7.104 -2.704,7.104 -2.9,7.3 -2.9,14.654 -2.754,14.8 10.3,14.8 10.64,14.46 J101.4
SW_IO: J101.3 U102.19 | length 30.6
  L1 (Signal) w0.25: U102.19 -3.554,6.475 -3.7,6.621 -3.7,14.9 -3,15.6 12.4,15.6 13.1,14.9 13.1,12.68 J101.3
USB_D_N: D105.1 J102.2 U102.17 | length 29.9
  L1 (Signal) w0.286: U102.17 -1.103,5.222 -0.021,5.222 0.363,5.606 1.646,5.606 2.1,6.06 2.1,7.9 3.8,9.6 17.508,9.6 17.711,9.397 17.711,5.185 18.165,4.73 18.875,4.73 19.043,4.563 19.043,4.532 19.1,4.475 D105.1 19.2,4.65 J102.2
USB_D_P: D106.1 J102.3 U102.18 | length 29.9
  L1 (Signal) w0.286: U102.18 -1.088,5.763 -0.172,5.763 0.16,6.096 1.443,6.096 1.611,6.263 1.611,8.103 3.597,10.089 17.711,10.089 18.2,9.6 18.2,5.387 18.368,5.22 18.875,5.22 19.043,5.387 19.043,5.418 19.1,5.475 D106.1 19.2,5.3 J102.3
VBUS: C101.2 D104.1 J102.1 U101.3 | length 15.4
  L1 (Signal) w0.4: U101.3 12.6,7.325 14.525,7.325 C101.2 16.016,7.25 16.7,6.566 16.7,5.1 17.65,4.15 17.65,1.919 18.169,1.4 19.896,1.4 20.13,1.634 20.13,3.58 20.55,4 J102.1
pads on no net: J102.4 J102.6 J102.7 J102.8 J102.9 J102.10 J102.11 U103.5 U103.7 U103.13 U103.14 U103.15 U103.16 U103.17 U103.18 U103.19 U103.20 U103.24 U103.25 U103.26 U103.27

## Polygon pours and split planes (outlines as drawn)
GND on L1 (Signal) "GND_L01_P056" (solid, pour order 56): 19.4,0.4 19.4,-13.7 1.5,-13.7 1.5,0.4
GND on L1 (Signal) "GND_L01_P049" (solid, pour order 49): -11.998,7.6 -11.998,8.2 -11.85,8.2 -11.85,7.6 -9.9,7.6 -9.9,10.2 -10.6,10.2 -10.6,12.5 -14.45,12.5 -14.45,10.2 -15.95,10.2 -15.95,7.6
+3V3 on L1 (Signal) "+3V3_L01_P003" (solid, pour order 3): 5.1,7.4 5.1,6.8 11.1,6.8 11.1,5.7 13.7,5.7 13.7,4.5 11.1,4.5 11.1,3.3 4,3.3 4,7.4
GND on L1 (Signal) "GND_L01_P002" (solid, pour order 2): -14.214,-10.7 -14.214,-10.724 -14.771,-10.724 -14.771,-10.7 -16.8,-10.7 -16.8,-12.6 -11.7,-12.6 -11.7,-9.6 -14.1,-9.6 -14.1,-10.7
GND on L1 (Signal) "GND_L01_P000" (solid, pour order 0): -8.3,3.7 -10.8,3.7 -10.8,1.5 -8.3,1.5
GND on L4 (Signal) "GND_L04_P057" (solid, pour order 57): 19.4,0.4 19.4,-13.7 1.5,-13.7 1.5,0.4
+3V3 on L3 (PWR) (split plane): 24.596,16.482 24.688,16.454 24.773,16.409 24.848,16.348 24.909,16.273 24.954,16.188 24.982,16.096 24.991,16.012 24.99,16 24.99,-16 24.991,-16.012 24.982,-16.096 24.954,-16.188 24.909,-16.273 24.848,-16.348 24.773,-16.409 24.688,-16.454 24.596,-16.482 24.512,-16.491 24.5,-16.49 -24.5,-16.49 -24.512,-16.491 -24.596,-16.482 -24.688,-16.454 -24.773,-16.409 -24.848,-16.348 -24.909,-16.273 -24.954,-16.188 -24.982,-16.096 -24.991,-16.012 -24.99,-16 -24.99,16 -24.991,16.012 -24.982,16.096 -24.954,16.188 -24.909,16.273 -24.848,16.348 -24.773,16.409 -24.688,16.454 -24.596,16.482 -24.512,16.491 -24.5,16.49 24.5,16.49 24.512,16.491
GND on L2 (GND) (split plane): 24.596,16.482 24.688,16.454 24.773,16.409 24.848,16.348 24.909,16.273 24.954,16.188 24.982,16.096 24.991,16.012 24.99,16 24.99,-16 24.991,-16.012 24.982,-16.096 24.954,-16.188 24.909,-16.273 24.848,-16.348 24.773,-16.409 24.688,-16.454 24.596,-16.482 24.512,-16.491 24.5,-16.49 -24.5,-16.49 -24.512,-16.491 -24.596,-16.482 -24.688,-16.454 -24.773,-16.409 -24.848,-16.348 -24.909,-16.273 -24.954,-16.188 -24.982,-16.096 -24.991,-16.012 -24.99,-16 -24.99,16 -24.991,16.012 -24.982,16.096 -24.954,16.188 -24.909,16.273 -24.848,16.348 -24.773,16.409 -24.688,16.454 -24.596,16.482 -24.512,16.491 -24.5,16.49 24.5,16.49 24.512,16.491

## Other copper
L1 (Signal):
  pour cut-out: 10.9,-6.6 ccw(c12.4,-6.6) 12.4,-8.1 ccw(c12.4,-6.6) 13.9,-6.6 ccw(c12.4,-6.6) 12.4,-5.1 ccw(c12.4,-6.6)
L4 (Signal):
  pour cut-out: 10.9,-6.6 ccw(c12.4,-6.6) 12.4,-8.1 ccw(c12.4,-6.6) 13.9,-6.6 ccw(c12.4,-6.6) 12.4,-5.1 ccw(c12.4,-6.6)

## Silkscreen, mask and mechanical layers (free items; w line width, h text height)
Top Overlay:
  region: 18.525,14.65 18.025,14.65 18.275,14.15
  lines w0.2: -22.5,-5.8 -22.5,-2.3 -18,-2.3 ; -22.5,5.3 -22.5,9.3 -17.1,9.3 ; -22.3,-9.7 -24.6,-9.7 -24.6,-7.6 -22.6,-7.6 -22.3,-7.6 ; -6.9,14.1 -6.9,16 -4.8,16 -4.8,14.1 ; -4.2,14.1 0.3,14.1 0.3,11.7
  text "BOOT0" at -4.133,14.6 h1
  text "HI" at -5.4,14.134 h1 r90
  text "USB" at 20.467,10.2 h1
  text "RESET" at -22.533,9.8 h1
  text "GNSS" at -22.433,-1.8 h1
  text "ON" at -24.033,-9.2 h1
  text "DENNIS MICRO COMPUTERS" at -10.663,-15.7 h1
Bottom Overlay:
  drawing of 9 lines, arcs and shapes, not listed
  text "WWW.DENNISMICROS.COM" at 19.697,14.6 h1
  text "PA7" at 3.6,10.933 h1 r90
  text "PA6" at 5,8.267 h1 r270
  text "PA5" at 7.5,8.267 h1 r270
  text "GND" at 15.3,8.267 h1 r270
  text "3V3" at 17.7,8.267 h1 r270
  text "SWIO" at 12.7,7.451 h1 r270
  text "SWCLK" at 10.1,6.267 h1 r270
  text "(c) 2024" at -10.335,-14 h1
  text "EVB-A32QS1_RFRG REV 0.1" at 4.327,-15.817 h1
Mechanical 1:
  the board outline again, w0.1